# Allegro board CLAYR6.brd
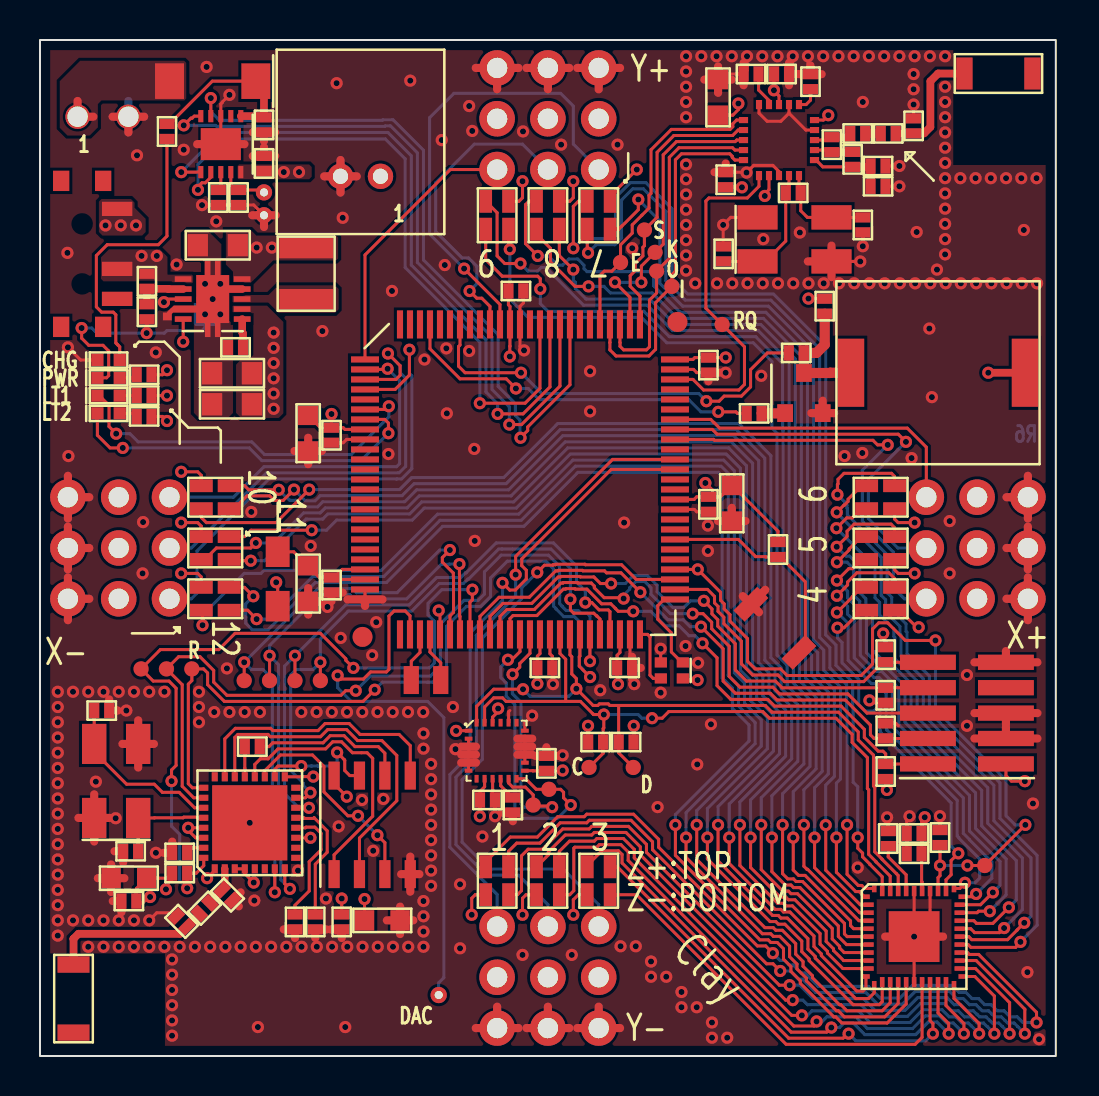
[diagram p0: board, top side]
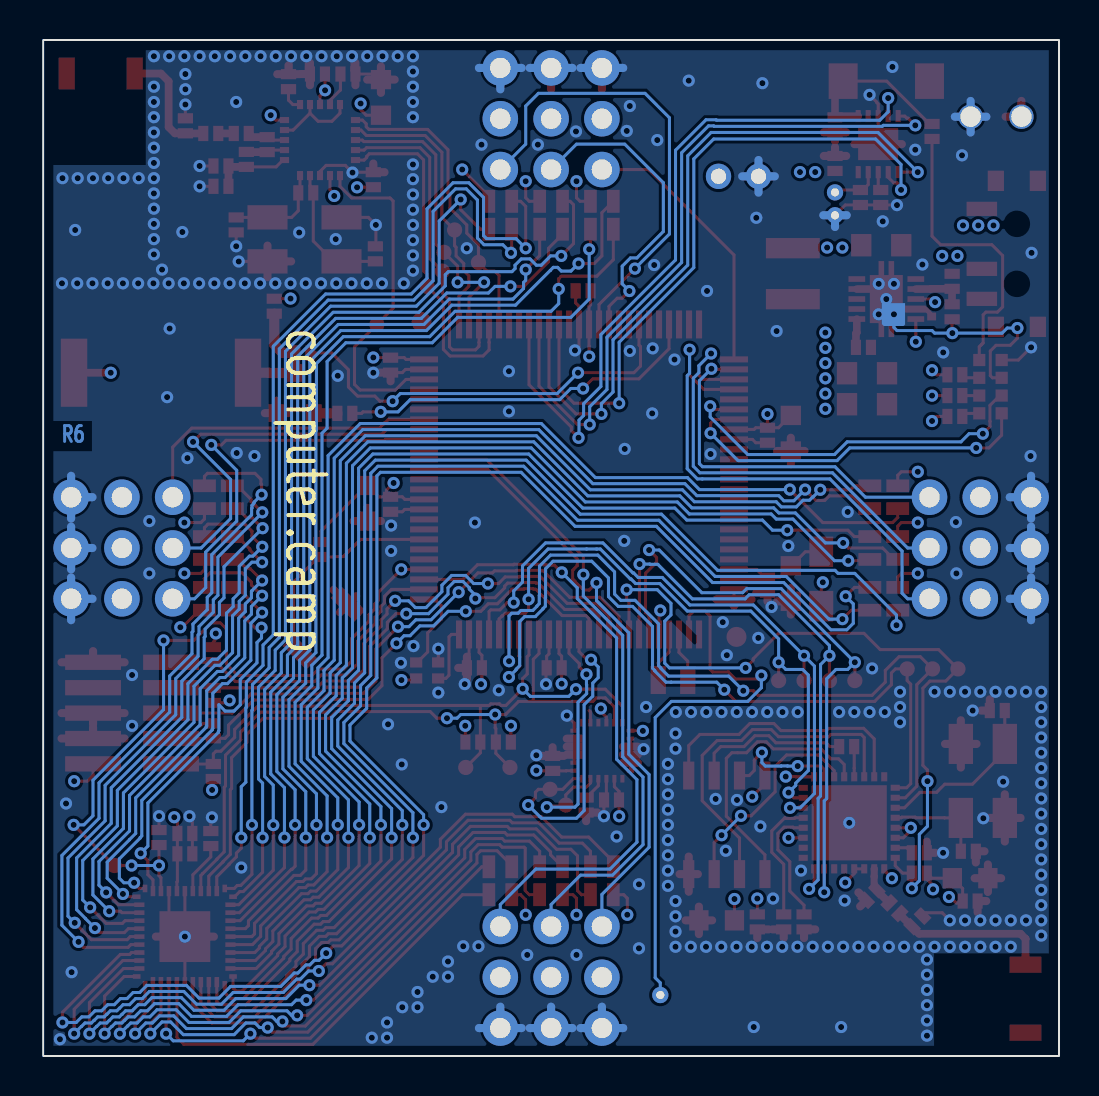
[diagram p1: board, bottom side, seen from below]

Outline 50.8 x 50.8 mm; copper layers: TOP, GND, PWR, BOTTOM. Coordinates in mm from the lower left corner of the outline.

## Placement (name value [footprint] x y rotation side)
AE1  2450AT18A100E  [ANT_1206]  47.93 49.12 0 top
AE2  2450AT18A100E  [ANT_1206]  1.68 2.87 270 top
C1  1uF  [C0402]  11.2 44.63 90 top
C3  1uF  [C0402]  11.2 46.56 270 top
C4  .1uf  [C0402]  25.32 14.63 90 top
C5  .1uf  [C0402]  22.38 12.8 0 top
C6  .1uf  [C0402]  23.65 12.55 270 top
C7  .1uf  [C0402]  34.29 43.81 90 top
C8  .1uf  [C0402]  37.08 49.1 0 top
C9  10uF  [C0603]  33.91 47.93 90 top
C10  1.5pF  [C0402]  42.42 46.13 0 top
C11  1.0pF  [C0402]  43.69 46.51 90 top
C12  2200pF  [C0402]  41.91 44.5 0 top
C13  4.7pF  [C0402]  41.91 43.48 0 top
C14  22pF  [C0402]  34.19 40.11 90 top
C15  22pF  [C0402]  41.15 41.55 270 top
C16  .033uF  [C0402]  35.56 49.1 180 top
C17  1uF  [C0402]  43.71 10.11 180 top
C18  .1uf  [C0402]  43.71 11.13 180 top
C19  .1uf  [C0402]  14.58 23.55 270 top
C20  10uF  [C0603]  13.41 23.62 270 top
C21  .1uf  [C0402]  14.58 31.04 270 top
C22  .1uf  [C0402]  29.24 19.41 0 top
C23  .1uf  [C0402]  23.8 38.25 0 top
C24  .1uf  [C0402]  25.25 19.41 0 top
C25  .1uf  [C0402]  33.43 34.54 270 top
C26  .1uf  [C0402]  33.43 27.58 270 top
C27  10uF  [C0603]  34.59 27.64 270 top
C28  10uF  [C0603]  13.41 31.14 270 top
C29  10uF  [C0805]  9.6 32.59 180 top
C30  10uF  [C0805]  8.89 40.54 180 top
C31  10uF  [C0805]  9.6 34.14 180 top
C32  .1uf  [C0402]  9.78 35.43 180 top
C33  10uF  [C0603]  4.45 8.89 180 top
C34  10uF  [C0603]  17.12 6.78 0 top
C35  .1uf  [C0402]  4.45 7.75 180 top
C36  .1uf  [C0402]  15.09 6.71 270 top
C37  5.6pF  [C0402]  8.23 7.39 225 top
C38  15pF  [C0402]  4.53 10.24 180 top
C39  15pF  [C0402]  3.09 17.27 0 top
D1  SE20AFJ-M3/6A  [DO_221AC]  8.64 48.74 180 top
DS1  LB_QH9G_N100_35_1  [LED_0402]  3.43 34.8 0 top
DS2  LB_QH9G_N100_35_1  [LED_0402]  3.43 33.02 0 top
DS3  LB_QH9G_N100_35_1  [LED_0402]  3.43 32.13 0 top
DS4  -  [LTST_C19FD1WT]  27.94 42.04 90 top
DS5  -  [LTST_C19FD1WT]  25.4 42.04 90 top
DS6  -  [LTST_C19FD1WT]  22.86 42.04 90 top
DS7  -  [LTST_C19FD1WT]  8.76 27.94 180 top
DS8  -  [LTST_C19FD1WT]  8.76 25.4 180 top
DS9  -  [LTST_C19FD1WT]  8.76 22.86 180 top
DS10  -  [LTST_C19FD1WT]  27.94 8.76 270 top
DS11  -  [LTST_C19FD1WT]  25.4 8.76 270 top
DS12  -  [LTST_C19FD1WT]  22.86 8.76 270 top
DS13  -  [LTST_C19FD1WT]  42.04 22.86 0 top
DS14  -  [LTST_C19FD1WT]  42.04 25.4 0 top
DS15  -  [LTST_C19FD1WT]  42.04 27.94 0 top
DS16  LB_QH9G_N100_35_1  [LED_0402]  3.43 33.91 0 top
J1  640456-2  [2X1_HEADER_100]  1.88 46.96 0 top
J2  S2B-PH-K-S(LF)(SN)  [JST2_SIDE_PTH]  16.03 46.58 0 top
J3  GPIO_3x3_100  [GPIO_3X3_100]  25.4 3.94 0 top
J4  GPIO_3x3_100  [GPIO_3X3_100]  25.4 46.86 180 top
J5  GPIO_3x3_100  [GPIO_3X3_100]  3.94 25.4 270 top
J6  GPIO_3x3_100  [GPIO_3X3_100]  46.86 25.4 90 top
J7  2x5 SMT  [FTSH_10]  46.35 17.14 90 top
L1  3.9nH  [L0402]  40.89 46.13 0 top
L2  8.2nH  [L0402]  39.6 45.57 90 top
L3  2.7nH  [L0402]  40.64 44.83 270 top
L4  600 Ohm  [FERRITE0805]  11.89 23.85 270 top
L5  2.2uH  [L1210]  13.31 39.12 270 top
L6  3.9nH  [L0402]  9.37 8.05 135 top
L7  3.9nH  [L0402]  7.09 6.73 315 top
LS1  PKMCS0909E4000-R1  [PKMCS]  44.91 34.16 0 top
NOREF  -  []  0 0 90 top
NOREF#2  -  []  25.4 25.4 0 top
NOREF#3  -  []  0 50.8 0 top
Q1  3904  [SOT23_3]  38.2 33.15 180 top
R1  30  [R0402]  6.35 46.23 90 top
R2  30  [R0402]  5.21 33.02 0 top
R3  30  [R0402]  5.21 31.98 0 top
R4  10k  [R0402]  36.91 25.32 90 top
R5  10k  [R0402]  9.93 42.93 90 top
R6  3.0k  [R0402]  8.92 42.93 90 top
R7  1.0K  [R0402]  39.24 37.49 90 top
R8  1.0K  [R0402]  37.82 35.15 0 top
R9  1.0K  [R0402]  35.71 32.13 0 top
R10  10k  [R0402]  29.31 15.7 0 top
R11  10k  [R0402]  27.79 15.7 180 top
R12  1M  [R0402]  37.67 43.15 0 top
R13  22k  [R0402]  38.53 48.72 270 top
R14  100k  [R0402]  45.01 10.92 270 top
R15  7.68k  [R0402]  42.42 10.87 270 top
R16  10k  [R0402]  42.29 20.07 270 top
R17  10k  [R0402]  42.29 18.03 90 top
R18  10k  [R0402]  42.29 16.26 270 top
R19  10k  [R0402]  42.29 14.22 90 top
R20  2.55M  [R0402]  5.35 38.73 90 top
R21  30  [R0402]  5.21 34.06 0 top
R22  220k  [R0402]  5.35 37.21 90 top
R23  10k  [R0402]  12.75 6.71 90 top
R24  10k  [R0402]  13.77 6.71 90 top
R25  10k  [R0402]  6.98 9.14 180 top
R26  200  [R0402]  10.62 15.47 0 top
R27  12k  [R0402]  6.98 10.16 0 top
SW1  CUS-12TB  [CUS_12TB]  2.11 40.11 270 top
SW2  B3U-1000P  [TAC_SWITCH_B3U_1000P]  36.75 21.39 315 top
TP1  TP  [TP_030]  29.67 14.43 0 top
TP2  TP  [TP_030]  27.46 14.43 0 top
TP3  TP  [TP_030]  24.66 12.55 0 top
TP4  TP  [TP_030]  25.45 13.33 0 top
TP5  TP  [TP_030]  29.03 39.67 90 top
TP6  TP  [TP_030]  30.23 41.3 90 top
TP7  TP  [TP_030]  30.76 40.18 90 top
TP8  TP  [TP_030]  30.84 39.24 90 top
TP9  TP  [TP_030]  31.6 38.48 90 top
TP10  TP  [TP_030]  34.11 36.58 90 top
TP11  TP  [TP_030]  47.24 9.52 0 top
TP12  TP  [TP_030]  7.59 19.35 0 top
TP13  TP  [TP_030]  6.32 19.35 0 top
TP14  TP  [TP_030]  5.05 19.35 0 top
TP15  TP  [TP_030]  14.02 18.77 0 top
TP16  TP  [TP_030]  12.75 18.77 0 top
TP17  TP  [TP_030]  11.48 18.77 0 top
TP18  TP  [TP_030]  10.21 18.77 0 top
U1  LM3658  [WSON10_3X3]  9.04 45.59 180 top
U2  MPU9250  [QFN24_3X3]  22.83 15.27 0 top
U3  NRF24L01P  [QFN20_4X4]  36.96 45.8 0 top
U4  IS31FL3236  [QFN44_5X5]  43.71 5.97 0 top
U5  MK64FN1M0VLL12  [QFP100_14X14]  24 28.83 0 top
U6  TPS61201DRCT  [VSON10_3X3]  8.64 37.85 90 top
U7  ESP8266EX  [QFN32_5X5]  10.49 11.66 90 top
U8  W25Q80DVSNIG  [CL_SOIC8]  16.61 11.56 0 top
W1  26AWG  [WIRE_26AWG]  19.94 3.05 0 top
W2  26AWG  [WIRE_26AWG]  11.2 43.18 0 top
W3  26AWG  [WIRE_26AWG]  11.2 42.04 0 top
Y1  16MHz  [TXC_XTAL_5X3]  37.73 40.83 0 top
Y2  8MHz  [ASCO]  31.6 19.28 180 top
Y3  34.728kHz  [ABS06]  19.3 18.8 0 top
Y4  26MHz  [TXC_XTAL_5X3]  3.81 13.75 90 top

## Library data of the parts
AE1 AE2 = ANTENNA
C1 C3-C39 = CAP_NP
D1 = DIODE
DS1-DS3 DS16 = LED
DS4-DS15 = LTST_C19FD1WT
J1 J2 = CON_2PIN
J3-J6 = GPIO_3X3_100
J7 = CON_10PIN
L1-L3 L5-L7 = INDUCTOR
L4 = FERRITE
LS1 = BUZZER
Q1 = NPN
R1-R27 = RESISTOR
SW1 = SWITCH_SPDT
SW2 = SPST_NO
TP1-TP18 = TESTPOINT
U1 = LM3658
U2 = MPU9250
U3 = NRF24L01
U4 = IS31FL3236
U5 = MK64FN1M0VLL12
U6 = TPS61201
U7 = ESP8266EX
U8 = W25Q
W1-W3 = WIRE
Y1 Y4 = CRYSTAL_4
Y2 = ASCO_OSC
Y3 = CRYSTAL

## Footprints (pads in the part's own frame, mm; a bottom-side part is the same pattern mirrored in y, then rotated)
2X1_HEADER_100
  round 1.219 hole 1.016: 1(0,0) 2(2.54,0)
ABS06
  rect 0.762x1.397 smd: 1(-0.737,0) 2(0.737,0)
ANT_1206
  rect 0.813x1.6 smd: 1(-1.7,0) 2(1.7,0)
ASCO
  rect 0.61x0.508 smd: 1(-0.55,-0.4) 2(0.55,-0.4) 3(0.55,0.4) 4(-0.55,0.4)
C0402
  rect 0.508x0.762 smd: 1(-0.375,0) 2(0.375,0)
C0603
  rect 0.965x1.016 smd: 1(-0.889,0) 2(0.889,0)
C0805
  rect 1.016x1.118 smd: 1(-1,0) 2(1,0)
CL_SOIC8
  rect 0.559x1.397 smd: 1(-1.905,-2.464) 2(-0.635,-2.464) 3(0.635,-2.464) 4(1.905,-2.464) 5(1.905,2.464) 6(0.635,2.464) 7(-0.635,2.464) 8(-1.905,2.464)
CUS_12TB
  rect 1.016x0.813 smd: (-3.65,1.05) (-3.65,-1.05) (3.65,1.05) (3.65,-1.05)
  round 0 smd: (-1.5,0) (1.5,0)
  rect 0.711x1.524 smd: 1(-2.25,1.75) 2(0.75,1.75) 3(2.25,1.75)
DO_221AC
  rect 1.448x1.778 smd: 1(-2.159,0) 2(2.159,0)
FERRITE0805
  rect 1.524x1.194 smd: 1(-1.359,0) 2(1.359,0)
FTSH_10
  rect 0.762x2.794 smd: 1(-2.54,-1.95) 2(-2.54,1.95) 3(-1.27,-1.95) 4(-1.27,1.95) 5(0,-1.95) 6(0,1.95) 7(1.27,-1.95) 8(1.27,1.95) 9(2.54,-1.95) 10(2.54,1.95)
GPIO_3X3_100
  round 1.778 hole 1.016: 1(-2.54,2.54) 2(0,2.54) 3(2.54,2.54) 4(-2.54,0) 5(0,0) 6(2.54,0) 7(-2.54,-2.54) 8(0,-2.54) 9(2.54,-2.54)
JST2_SIDE_PTH
  round 1.27 hole 0.762: 1(1,-2.6) 2(-1,-2.6)
L0402
  rect 0.508x0.762 smd: 1(-0.375,0) 2(0.375,0)
L1210
  rect 1.016x2.692 smd: 1(-1.275,0) 2(1.275,0)
LED_0402
  rect 0.61x0.61 smd: 1(-0.559,0) 2(0.559,0)
LTST_C19FD1WT
  rect 1.143x0.635 smd: 1(0.699,0.572) 2(-0.699,0.572) 3(-0.699,-0.572) 4(0.699,-0.572)
PKMCS
  rect 1.321x3.404 smd: 1(-4.35,0) 2(4.35,0)
QFN20_4X4
  rect 0.457x0.305 smd: 1(-1.775,1.001) 2(-1.775,0.501) 3(-1.775,0.001) 4(-1.775,-0.499) 5(-1.775,-0.999) 11(1.775,-0.999) 12(1.775,-0.499) 13(1.775,0.001) 14(1.775,0.501) 15(1.775,1.001)
  rect 0.305x0.457 smd: 6(-1.001,-1.775) 7(-0.501,-1.775) 8(-0.001,-1.775) 9(0.499,-1.775) 10(0.999,-1.775) 16(0.999,1.775) 17(0.499,1.775) 18(-0.001,1.775) 19(-0.501,1.775) 20(-1.001,1.775)
QFN24_3X3
  rect 0.381x0.203 smd: 1(-1.402,1) 2(-1.402,0.6) 3(-1.402,0.2) 4(-1.402,-0.2) 5(-1.402,-0.6) 6(-1.402,-1) 13(1.412,-1) 14(1.412,-0.6) 15(1.412,-0.2) 16(1.412,0.2) 17(1.412,0.6) 18(1.412,1)
  rect 0.203x0.381 smd: 7(-1,-1.402) 8(-0.6,-1.402) 9(-0.2,-1.402) 10(0.2,-1.402) 11(0.6,-1.402) 12(1,-1.402) 19(1,1.402) 20(0.6,1.402) 21(0.2,1.402) 22(-0.2,1.402) 23(-0.6,1.402) 24(-1,1.402)
QFN32_5X5
  rect 0.457x0.305 smd: 1(-2.301,1.75) 2(-2.301,1.25) 3(-2.301,0.749) 4(-2.301,0.249) 5(-2.301,-0.251) 6(-2.301,-0.752) 7(-2.301,-1.252) 8(-2.301,-1.753) 17(2.301,-1.753) 18(2.301,-1.252) 19(2.301,-0.752) 20(2.301,-0.251) 21(2.301,0.249) 22(2.301,0.749) 23(2.301,1.25) 24(2.301,1.75)
  rect 0.305x0.457 smd: 9(-1.75,-2.301) 10(-1.25,-2.301) 11(-0.749,-2.301) 12(-0.249,-2.301) 13(0.251,-2.301) 14(0.752,-2.301) 15(1.252,-2.301) 16(1.753,-2.301) 25(1.753,2.301) 26(1.252,2.301) 27(0.752,2.301) 28(0.251,2.301) 29(-0.249,2.301) 30(-0.749,2.301) 31(-1.25,2.301) 32(-1.75,2.301)
  rect 3.759x3.759 smd: 33(0,0)
QFN44_5X5
  rect 0.381x0.229 smd: 1(-2.409,1.994) 11(-2.409,-1.994) 23(2.409,-1.994) 33(2.409,1.994)
  rect 0.508x0.229 smd: 2(-2.276,1.595) 3(-2.276,1.196) 4(-2.276,0.798) 5(-2.276,0.399) 6(-2.276,0) 7(-2.276,-0.399) 8(-2.276,-0.798) 9(-2.276,-1.196) 10(-2.276,-1.595) 24(2.276,-1.595) 25(2.276,-1.196) 26(2.276,-0.798) 27(2.276,-0.399) 28(2.276,0) 29(2.276,0.399) 30(2.276,0.798) 31(2.276,1.196) 32(2.276,1.595)
  rect 0.229x0.381 smd: 12(-1.994,-2.409) 22(1.994,-2.409) 34(1.994,2.409) 44(-1.994,2.409)
  rect 0.229x0.508 smd: 13(-1.595,-2.276) 14(-1.196,-2.276) 15(-0.798,-2.276) 16(-0.399,-2.276) 17(0,-2.276) 18(0.399,-2.276) 19(0.798,-2.276) 20(1.196,-2.276) 21(1.595,-2.276) 35(1.595,2.276) 36(1.196,2.276) 37(0.798,2.276) 38(0.399,2.276) 39(0,2.276) 40(-0.399,2.276) 41(-0.798,2.276) 42(-1.196,2.276) 43(-1.595,2.276)
  rect 2.54x2.54 smd: 45(0,0)
QFP100_14X14
  round 1 smd: (-7.874,-7.874) (7.874,7.874)
  rect 1.397x0.305 smd: 1(-7.75,6) 2(-7.75,5.5) 3(-7.75,5) 4(-7.75,4.5) 5(-7.75,4) 6(-7.75,3.5) 7(-7.75,3) 8(-7.75,2.5) 9(-7.75,2) 10(-7.75,1.5) 11(-7.75,1) 12(-7.75,0.5) 13(-7.75,0) 14(-7.75,-0.5) 15(-7.75,-1) 16(-7.75,-1.5) 17(-7.75,-2) 18(-7.75,-2.5) 19(-7.75,-3) 20(-7.75,-3.5) 21(-7.75,-4) 22(-7.75,-4.5) 23(-7.75,-5) 24(-7.75,-5.5) 25(-7.75,-6) 51(7.75,-6) 52(7.75,-5.5) 53(7.75,-5) 54(7.75,-4.5) 55(7.75,-4) 56(7.75,-3.5) 57(7.75,-3) 58(7.75,-2.5) 59(7.75,-2) 60(7.75,-1.5) 61(7.75,-1) 62(7.75,-0.5) 63(7.75,0) 64(7.75,0.5) 65(7.75,1) 66(7.75,1.5) 67(7.75,2) 68(7.75,2.5) 69(7.75,3) 70(7.75,3.5) 71(7.75,4) 72(7.75,4.5) 73(7.75,5) 74(7.75,5.5) 75(7.75,6)
  rect 0.305x1.397 smd: 26(-6,-7.75) 27(-5.5,-7.75) 28(-5,-7.75) 29(-4.5,-7.75) 30(-4,-7.75) 31(-3.5,-7.75) 32(-3,-7.75) 33(-2.5,-7.75) 34(-2,-7.75) 35(-1.5,-7.75) 36(-1,-7.75) 37(-0.5,-7.75) 38(0,-7.75) 39(0.5,-7.75) 40(1,-7.75) 41(1.5,-7.75) 42(2,-7.75) 43(2.5,-7.75) 44(3,-7.75) 45(3.5,-7.75) 46(4,-7.75) 47(4.5,-7.75) 48(5,-7.75) 49(5.5,-7.75) 50(6,-7.75) 76(6,7.75) 77(5.5,7.75) 78(5,7.75) 79(4.5,7.75) 80(4,7.75) 81(3.5,7.75) 82(3,7.75) 83(2.5,7.75) 84(2,7.75) 85(1.5,7.75) 86(1,7.75) 87(0.5,7.75) 88(0,7.75) 89(-0.5,7.75) 90(-1,7.75) 91(-1.5,7.75) 92(-2,7.75) 93(-2.5,7.75) 94(-3,7.75) 95(-3.5,7.75) 96(-4,7.75) 97(-4.5,7.75) 98(-5,7.75) 99(-5.5,7.75) 100(-6,7.75)
R0402
  rect 0.508x0.762 smd: 1(-0.375,0) 2(0.375,0)
SOT23_3
  rect 0.787x0.889 smd: 1(0.94,1.003) 2(-0.94,1.003) 3(0,-1.003)
TAC_SWITCH_B3U_1000P
  rect 0.787x1.676 smd: 1(-1.7,0) 2(1.7,0)
TP_030
  round 0.762 smd: 1(0,0)
TXC_XTAL_5X3
  rect 2.007x1.219 smd: 1(-1.85,-1.1) 2(1.85,-1.1) 3(1.85,1.1) 4(-1.85,1.1)
VSON10_3X3
  rect 0.279x0.838 smd: 1(-1,-1.475) 2(-0.5,-1.475) 3(0,-1.475) 4(0.5,-1.475) 5(1,-1.475) 6(1,1.475) 7(0.5,1.475) 8(0,1.475) 9(-0.5,1.475) 10(-1,1.475)
  custom 3.8x1.65 smd: 11(0,0)
WIRE_26AWG
  round 0.813 hole 0.406: 1(0,0)
WSON10_3X3
  rect 0.254x0.61 smd: 1(-1,-1.4) 2(-0.5,-1.4) 3(0,-1.4) 4(0.5,-1.4) 5(0.999,-1.4) 6(0.999,1.4) 7(0.5,1.4) 8(0,1.4) 9(-0.5,1.4) 10(-1,1.4)
  rect 2.007x1.6 smd: 11(0,0)

## Nets
GND: C1.2 C3.2 C4.2 C5.2 C6.2 C7.2 C8.2 C9.2 C11.2 C12.2 C13.2 C14.2 C15.2 C16.2 C17.2 C18.2 C19.2 C20.2 C21.2 C22.2 C23.2 C24.2 C25.2 C26.2 C27.2 C28.2 C33.2 C34.2 C35.2 C36.2 C38.2 C39.2 DS1.1(C) J1.2 J2.2 J3.7(GND2) J3.8(GND1) J3.9(GND) J4.7(GND2) J4.8(GND1) J4.9(GND) J5.7(GND2) J5.8(GND1) J5.9(GND) J6.7(GND2) J6.8(GND1) J6.9(GND) J7.3 J7.5 J7.9 L6.1 L7.1 Q1.2(E) R5.1 R6.1 R13.1 R14.1 R15.1 R18.1 R23.1 R24.1 R27.1 SW2.1 U1.3(GND#3) U1.11(GND#11) U2.2(NC5) U2.3(NC4) U2.4(NC3) U2.5(NC2) U2.6(NC) U2.9(AD0/SDO) U2.14(NC6) U2.15(NC7) U2.16(NC8) U2.17(NC9) U2.18(GND) U2.20(RESV_GND) U3.8(VSS#8) U3.14(VSS#14) U3.17(VSS#17) U3.20(VSS#20) U4.17(GND#17) U4.37(AD) U4.39(GND#39) U4.45(GND#45) U5.9(VSS#9) U5.24(VREFL) U5.25(VSSA) U5.41(VSS#41) U5.49(VSS#49) U5.60(VSS#60) U5.74(VSS#74) U5.88(VSS#88) U6.9(GND) U7.33(GND) U8.4(GND) W3.1 Y1.2(GND) Y1.4(GND4) Y2.2(GND) Y4.2(GND) Y4.4(GND4)
PGND: C29.2 C30.2 C31.2 C32.2 DS16.1(C) R22.1 U6.4(PGND) U6.11(PGND2)
VBAT: C30.1 L5.1 R20.2 SW1.2 U6.5(VIN) U6.6(EN) U6.8(PS)
VCC: C4.1 C5.1 C7.1 C8.1 C9.1 C17.1 C18.1 C21.1 C22.1 C23.1 C24.1 C25.1 C26.1 C27.1 C28.1 C29.1 C31.1 C33.1 C34.1 C35.1 C36.1 DS4.4(VDD) DS5.4(VDD) DS6.4(VDD) DS7.4(VDD) DS8.4(VDD) DS9.4(VDD) DS10.4(VDD) DS11.4(VDD) DS12.4(VDD) DS13.4(VDD) DS14.4(VDD) DS15.4(VDD) J3.4(VDD) J3.5(VDD1) J3.6(VDD2) J4.4(VDD) J4.5(VDD1) J4.6(VDD2) J5.4(VDD) J5.5(VDD1) J5.6(VDD2) J6.4(VDD) J6.5(VDD1) J6.6(VDD2) J7.1 L4.2 LS1.2 R2.2 R3.2 R4.2 R7.2 R10.2 R11.2 R16.1 R17.1 R19.1 R21.2 R25.2 U2.1(RESV_VCC) U2.8(VDDIO#8) U2.13(VDDIO#13) U2.22(NCS) U3.7(VDD#7) U3.15(VDD#15) U3.18(VDD#18) U4.38(VCC) U5.8(VDD#8) U5.30(VBAT) U5.40(VDD#40) U5.48(VDD#48) U5.61(VDD#61) U5.75(VDD#75) U5.89(VDD#89) U6.2(VOUT) U6.10(FB) U7.1(VDDA#1) U7.3(VDD3P3#3) U7.4(VDD3P3#4) U7.11(VDDPST#11) U7.17(VDDPST#17) U7.29(VDDD) U7.30(VDDA#30) U8.8(VCC) Y2.4(VDD)
VDD_RTC: U7.5(VDD_RTC)
#CS: U7.20(SD_CMD) U8.1(C\S\)
#HOLD: U7.18(SD_DATA_2) U8.7(H\O\L\D\)
#RST: J7.10 R16.2 U5.52(RESET_B)
#WP: U7.19(SD_DATA_3) U8.3(W\P\)
ADC0_DM0/ADC1_DM3: U5.19(ADC0_DM0/ADC1_DM3)
ADC0_DM1: U5.15(ADC0_DM1)
ADC0_DP0/ADC1_DP3: U5.18(ADC0_DP0/ADC1_DP3)
ADC0_DP1: U5.14(ADC0_DP1)
ADC1_DM0/ADC0_DM3: U5.21(ADC1_DM0/ADC0_DM3)
ADC1_DM1: U5.17(ADC1_DM1)
ADC1_DP0/ADC0_DP3: U5.20(ADC1_DP0/ADC0_DP3)
ADC1_DP1: U5.16(ADC1_DP1)
CHG_OUT: C1.1 J2.1 SW1.1 U1.10(BATT)
CLK: R26.2 U8.6(CLK)
DI: U7.23(SD_DATA_1) U8.5(DI)
DO: U7.22(SD_DATA_0) U8.2(DO)
EN_B: U1.4(USB_SEL) U5.83(PTC11/LLWU_P11/ADC1_SE7B/I2C1_S)
FSYNC: TP3.1 U2.11(FSYNC) U5.39(PTA5/USB_CLKIN/FTM0_CH2/MII0_RX)
IMU_INT: TP4.1 U2.12(INT) U5.38(PTA4/LLWU_P3/NMI_B/EZP_CS_B/FTM)
LED1: DS2.1(C) U5.6(PTE5/SPI1_PCS2/UART3_RX/SDHC0_D)
LED2: DS3.1(C) U5.7(PTE6/SPI1_PCS3/UART3_CTS_B/I2S0)
MESH_#CS: TP6.1 U3.2(CSN) U5.76(PTC4/LLWU_P8/SPI0_PCS0/UART1_TX)
MESH_CE: TP5.1 U3.1(CE) U5.80(PTC8/ADC1_SE4B/CMP0_IN2/FTM3_CH)
MESH_IRQ: TP10.1 U3.6(IRQ) U5.73(PTC3/LLWU_P7/CMP1_IN1/SPI0_PCS1)
MISO0: TP9.1 U3.5(MISO) U5.79(PTC7/CMP0_IN1/SPI0_SIN/USB_SOF_)
MOSI0: TP8.1 U3.4(MOSI) U5.78(PTC6/LLWU_P10/CMP0_IN0/SPI0_SOU)
PTA0/JTAG_TCLK/SWD_CLK/EZP_CLK/: J7.4 R18.2 U5.34(PTA0/JTAG_TCLK/SWD_CLK/EZP_CLK/)
PTA1/JTAG_TDI/EZP_DI/UART0_RX/F: J7.8 R17.2 U5.35(PTA1/JTAG_TDI/EZP_DI/UART0_RX/F)
PTA2/JTAG_TDO/TRACE_SWO/EZP_D0/: J7.6 U5.36(PTA2/JTAG_TDO/TRACE_SWO/EZP_D0/)
PTA3/JTAG_TMS/SWD_DIO/UART0_RTS: J7.2 R19.2 U5.37(PTA3/JTAG_TMS/SWD_DIO/UART0_RTS)
PTA18/EXTAL0/FTM0_FLT2/FTM_CLKI: U5.50(PTA18/EXTAL0/FTM0_FLT2/FTM_CLKI) Y2.3(OUT)
PTA19/XTAL0/FTM1_FLT0/FTM_CLKIN: U5.51(PTA19/XTAL0/FTM1_FLT0/FTM_CLKIN) Y2.1(EN)
PTB2/ADC0_SE12/I2C0_SCL/UART0_R: U5.55(PTB2/ADC0_SE12/I2C0_SCL/UART0_R)
PTB3/ADC0_SE13/I2C0_SDA/UART0_C: U5.56(PTB3/ADC0_SE13/I2C0_SDA/UART0_C)
PTB10/ADC1_SE14/SPI1_PCS0/UART3: U5.58(PTB10/ADC1_SE14/SPI1_PCS0/UART3)
PTB11/ADC1_SE15/SPI1_SCK/UART3_: U5.59(PTB11/ADC1_SE15/SPI1_SCK/UART3_)
PTB16/SPI1_SOUT/UART0_RX/FTM_CL: U5.62(PTB16/SPI1_SOUT/UART0_RX/FTM_CL)
PTB17/SPI1_SIN/UART0_TX/FTM_CLK: U5.63(PTB17/SPI1_SIN/UART0_TX/FTM_CLK)
PTB20/SPI2_PCS0/FB_AD31/CMP0_OU: U5.66(PTB20/SPI2_PCS0/FB_AD31/CMP0_OU)
PTC0/ADC0_SE14/SPI0_PCS4/PDB0_E: U5.70(PTC0/ADC0_SE14/SPI0_PCS4/PDB0_E)
PTC1/LLWU_P6/ADC0_SE15/SPI0_PCS: U5.71(PTC1/LLWU_P6/ADC0_SE15/SPI0_PCS)
PTC2/ADC0_SE4B/CMP1_IN0/SPI0_PC: U5.72(PTC2/ADC0_SE4B/CMP1_IN0/SPI0_PC)
PTC9/ADC1_SE5B/CMP0_IN3/FTM3_CH: U5.81(PTC9/ADC1_SE5B/CMP0_IN3/FTM3_CH)
PTC10/ADC1_SE6B/I2C1_SCL/FTM3_C: U5.82(PTC10/ADC1_SE6B/I2C1_SCL/FTM3_C)
PTC15/UART4_TX/FB_AD24: U5.87(PTC15/UART4_TX/FB_AD24)
PTC18/UART3_RTS_B/ENET0_1588_TM: U5.92(PTC18/UART3_RTS_B/ENET0_1588_TM)
PTD0/LLWU_P12/SPI0_PCS0/UART2_R: U5.93(PTD0/LLWU_P12/SPI0_PCS0/UART2_R)
PTD2/LLWU_P13/SPI0_SOUT/UART2_R: U5.95(PTD2/LLWU_P13/SPI0_SOUT/UART2_R)
PTD3/SPI0_SIN/UART2_TX/FTM3_CH3: U5.96(PTD3/SPI0_SIN/UART2_TX/FTM3_CH3)
PTD5/ADC0_SE6B/SPI0_PCS2/UART0_: U5.98(PTD5/ADC0_SE6B/SPI0_PCS2/UART0_)
PTD6/LLWU_P16/ADC0_SE7B/SPI0_PC: U5.99(PTD6/LLWU_P16/ADC0_SE7B/SPI0_PC)
PTD7/CMT_IRQ/UART0_TX/FTM0_CH7/: U5.100(PTD7/CMT_IRQ/UART0_TX/FTM0_CH7/)
PTE4/LLWU_P2/SPI1_PCS0/UART3_TX: U5.5(PTE4/LLWU_P2/SPI1_PCS0/UART3_TX)
SCK0: TP7.1 U3.3(SCK) U5.77(PTC5/LLWU_P9/SPI0_SCK/LPTMR0_AL)
SCL2: R11.1 TP2.1 U2.23(SCL/SCLK) U4.42(SCL) U5.42(PTA12/CMP2_IN0/CAN0_TX/FTM1_CH0)
SDA2: R10.1 TP1.1 U2.24(SDA/SDI) U4.41(SDA) U5.43(PTA13/LLWU_P4/CMP2_IN1/CAN0_RX/)
SDB: R14.2 TP11.1 U4.36(SDB) U5.54(PTB1/ADC0_SE9/ADC1_SE9/I2C0_SDA)
STAT1: U1.7(STAT1) U5.86(PTC14/UART4_RX/FB_AD25)
STAT2: U1.6(STAT2) U5.85(PTC13/UART4_CTS_B/FB_AD26)
USB0_DM: U5.11(USB0_DM)
USB0_DP: U5.10(USB0_DP)
USB_SEL: U1.5(EN_B) U5.84(PTC12/UART4_RTS_B/FB_AD27/FTM3_)
USBPWR: U1.2(USBPWR)
VOUT33: U5.12(VOUT33)
VREF_OUT/CMP1_IN5/CMP0_IN5/ADC1: U5.26(VREF_OUT/CMP1_IN5/CMP0_IN5/ADC1)
VREGIN: U5.13(VREGIN)
WIFI_#RESET: R25.1 TP14.1 U5.33(PTE26/ENET_1588_CLKIN/UART4_CTS) U7.32(EXT_RSTB)
WIFI_CHIP_EN: TP18.1 U5.31(PTE24/ADC0_SE17/UART4_TX/I2C0__) U7.7(CHIP_EN)
WIFI_GPIO0: TP15.1 U5.46(PTA16/SPI0_SOUT/UART0_CTS_B/UAR) U7.15(GPIO0)
WIFI_GPIO2: TP16.1 U5.47(PTA17/ADC1_SE17/SPI0_SIN/UART0_) U7.14(GPIO2)
WIFI_RX: TP12.1 U5.44(PTA14/SPI0_PCS0/UART0_TX/MII0_R) U7.25(U0RXD)
WIFI_TX: TP13.1 U5.45(PTA15/SPI0_SCK/UART0_RX/MII0_TX) U7.26(U0TXD)
WIFI_XPD_DCDC: TP17.1 U5.32(PTE24/ADC0_SE18/UART4_RX/I2C0_S) U7.8(XPD_DCDC)
N00198: LS1.1 Q1.3(C) R7.1 R8.2
N00230: R13.2 U3.16(IREF)
N00299: R5.2 U1.9(TS) W2.1
N00337: R6.2 U1.8(ISET)
N00355: L5.2 U6.3(L)
N00409: C15.1 R12.2 U3.10(XC1) Y1.3
N00478: C32.1 U6.1(VAUX)
N00507: C14.1 R12.1 U3.9(XC2) Y1.1
N00519: Q1.1(B) R9.2
N00975: R15.2 U4.40(R_EXT)
N01037: R20.1 R22.2 U6.7(UVLO)
N01220: DS16.2(A) R21.1
N01340: C16.1 U3.19(DVDD)
N01687: DS5.1(BLUE) U4.2(OUT4)
N01689: DS5.2(RED) U4.3(OUT5)
N01691: DS5.3(GREEN) U4.4(OUT6)
N01749: DS6.1(BLUE) U4.5(OUT7)
N01755: DS6.2(RED) U4.6(OUT8)
N01761: DS6.3(GREEN) U4.7(OUT9)
N02099: R26.1 U7.21(SD_CLK)
N02614: C6.1 U2.10(REGOUT)
N02615: DS7.1(BLUE) U4.8(OUT10)
N02621: DS7.2(RED) U4.9(OUT11)
N02627: DS7.3(GREEN) U4.10(OUT12)
N02738: DS8.1(BLUE) U4.11(OUT13)
N02744: DS8.2(RED) U4.12(OUT14)
N02750: DS8.3(GREEN) U4.13(OUT15)
N02922: DS9.1(BLUE) U4.14(OUT16)
N02928: DS9.2(RED) U4.15(OUT17)
N02934: DS9.3(GREEN) U4.16(OUT18)
N03097: C12.1 C13.1 L3.2 U3.11(VDD_PA)
N03359: DS10.1(BLUE) U4.18(OUT19)
N03365: DS10.2(RED) U4.19(OUT20)
N03371: DS10.3(GREEN) U4.20(OUT21)
N03382: C38.1 U7.28(XTAL_IN) Y4.1
N03395: C39.1 U7.27(XTAL_OUT) Y4.3
N03481: DS11.1(BLUE) U4.21(OUT22)
N03487: DS11.2(RED) U4.22(OUT23)
N03493: DS11.3(GREEN) U4.23(OUT24)
N03631: DS12.1(BLUE) U4.24(OUT25)
N03637: DS12.2(RED) U4.25(OUT26)
N03643: DS12.3(GREEN) U4.26(OUT27)
N03677: L2.1 L3.1 U3.12(ANT1)
N03692: L1.1 L2.2 U3.13(ANT2)
N03711: C10.1 L1.2
N03715: AE1.1(IN) C10.2 C11.1
N03833: DS15.1(BLUE) U4.27(OUT28)
N03839: DS15.2(RED) U4.28(OUT29)
N03845: DS15.3(GREEN) U4.29(OUT30)
N03893: DS14.1(BLUE) U4.30(OUT31)
N03895: DS14.2(RED) U4.31(OUT32)
N03897: DS14.3(GREEN) U4.32(OUT33)
N03935: DS13.1(BLUE) U4.33(OUT34)
N03941: DS13.2(RED) U4.34(OUT35)
N03947: DS13.3(GREEN) U4.35(OUT36)
N04099: R24.2 U7.13(MTDO)
N04101: R23.2 U7.12(MTCK)
N05845: DS4.3(GREEN) U4.1(OUT3)
N05857: DS4.2(RED) U4.44(OUT2)
N05869: DS4.1(BLUE) U4.43(OUT1)
N05962: C37.1 L6.2 U7.2(LNA)
N05976: AE2.1(IN) C37.2 L7.2
N06603: U5.29(EXTAL32) Y3.2
N06615: U5.28(XTAL32) Y3.1
N08855: C3.1 D1.1(C) R1.2 U1.1(CHG_IN)
N08912: D1.2(A) J1.1
N0016014: R27.2 U7.31(RES12K)
N18669: C19.1 C20.1 L4.1 U5.22(VDDA) U5.23(VREFH)
N19391: R9.1 U5.97(PTD4/LLWU_P14/SPI0_PCS1/UART0_R)
N19403: R8.1 U5.94(PTD1/ADC0_SE5B/SPI0_SCK/UART2_C)
N22156: J3.2(GPIO2) U5.65(PTB19/CAN0_RX/FTM2_CH1/I2S0_TX_)
N22160: J3.3(GPIO3) U5.53(PTB0/LLWU_P5/ADC0_SE8/ADC1_SE8/)
N25749: J6.1(GPIO1) U5.67(PTB21/SPI2_SCK/FB_AD30/CMP1_OUT)
N25751: J6.2(GPIO2) U5.68(PTB22/SPI2_SOUT/FB_AD29/CMP2_OU)
N25753: J6.3(GPIO3) U5.69(PTB23/SPI2_SIN/SPI0_PCS5/FB_AD2)
N26831: J4.1(GPIO1) U5.90(PTC16/UART3_RX/ENET0_1588_TMR0/)
N26833: J4.2(GPIO2) U5.91(PTC17/UART3_TX/ENET0_1588_TMR1/)
N26835: J4.3(GPIO3) U5.1(PTE0/ADC1_SE4A/SPI1_PCS1/UART1_)
N28499: J5.1(GPIO1) U5.2(PTE1/LLWU_P0/ADC1_SE5A/SPI1_SOU)
N28501: J5.2(GPIO2) U5.3(PTE2/LLWU_P1/ADC0_DP2/ADC1_SE6A)
N28503: J5.3(GPIO3) U5.4(PTE3/ADC0_DM2/ADC1_SE7A/SPI1_SI)
N29732: J3.1(GPIO1) U5.64(PTB18/CAN0_TX/FTM2_CH0/I2S0_TX_)
N33119: DS2.2(A) R2.1
N33141: DS3.2(A) R3.1
N33179: DS1.2(A) R1.1
N58139: U5.27(DAC0_OUT/CMP1_IN3/ADC0_SE23) W1.1
N59301: R4.1 SW2.2 U5.57(PTB9/SPI1_PCS1/UART3_CTS_B/FB_A)

Pads without a net: AE1 2; AE2 2; J7 7; SW1 3; U2 7 19 21; U7 6 9 10 16 24

## Via types
v1: diameter 0.61, hole 0.305, TOP to BOTTOM, 505 vias

## Routing (per net, layer and track width the routed paths; a pad name or vN(x,y) marks a point on that pad's centre or on a via; arc(x,y) is an arc through that point)
GND: length 272.2
  TOP w0.152: U3.20 35.96,47.14 36.36,46.74 37.05,46.74 37.46,47.14 ; v1(24.21,35.28) 24,35.48 U5.88 24,37.48 24.17,37.65 C23.2 ; U5.60 32.72,27.33 32.84,27.21 C26.2 ; U5.9 15.33,30.83 15.16,30.66 C21.2 ; v1(43.48,11.99) 43.47,11.99 43.34,11.86 C18.2 C17.2 43.33,10.1 ; R18.1 42.81,16.63 42.93,16.51 ; U3.17 37.46,47.14 ; 37.46,47.14 38.3,46.3 U3.14 ; U4.37 44.51,6.77 v1(43.71,5.97) ; C12.2 v1(42.98,44.5) ; v1(34.29,34.16) 33.43,34.16 C25.2 32.84,34.17 32.68,34.33 U5.74 ; C8.2 37.64,49.28 v1(37.64,49.99) ; C7.2 35.31,44.19 v1(35.33,44.17) 35.69,44.53 36.65,44.53 36.96,44.22 U3.8 ; C13.2 v1(42.98,43.48) ; Y1.2 40.79,39.73 40.79,39.73 v1(41.02,39.73) ; R14.1 45.01,11.91 45,11.92 v1(45,11.99) ; R15.1 42.42,11.76 42.38,11.79 42.38,11.91 v1(42.36,11.93) ; U2.14 U2.15 ; U5.24 U5.25 ; 29.61,19.96 29.61,19.99 29.5,20.1 U5.49 ; v1(31.04,20.36) 31.04,19.69 Y2.2 ; v1(24.61,17.02) 24.25,16.65 U2.18 ; C9.2 34.19,49.1 C16.2 35.36,49.27 v1(35.36,49.99) ; v1(43.71,5.97) U4.39 ; v1(43.71,5.97) U4.17 ; W3.1 10.69,42.55 R5.1 R6.1 8.19,42.55 8.18,42.55 v1(8.1,42.55) ; Y1.4 34.54,41.93 v1(34.16,41.55) 34.16,40.51 C14.2 ; U2.6 U2.5 ; C15.2 v1(41.15,40.49) ; v1(25.65,18.59) 25.65,19.37 C24.2 25.62,19.99 25.5,20.11 U5.41 ; v1(38.4,49.99) 38.4,49.22 R13.1 ; U2.9 22.63,12.92 C5.2 22.76,12.8 v1(22.76,11.99) ; C11.2 v1(43.69,47.57) ; v1(5.46,6.78) 5.84,7.16 6.66,7.16 L7.1 ; U1.11 9.04,45.59 U1.3 9.04,47.6 9.11,47.67 9.11,47.7 v1(9.47,48.06) ; DS1.1 2.03,34.8 v1(1.4,35.43) ; U2.20 23.43,17.21 23.49,17.27 ; U2.2 U2.3
  TOP w0.406: 18.52,8.22 U8.4 ; U8.4 18.97,9.09 ; U8.4 18.06,9.09 ; U8.4 18.52,9.97 ; J3.9 27.94,2.46 ; J3.9 29.01,1.4 ; J3.9 26.87,1.4 ; 15.14,23.17 C19.2 14.58,22.74 ; 21.8,15.07 U2.4 21.06,15.07 ; 46.73,19.68 J7.9 ; J7.9 48.3,20.24 ; J7.9 49.88,19.68 ; Y4.2 5.7,15.6 ; Y4.2 4.12,15.6 ; Y4.2 4.91,16.79 ; Y4.2 4.91,14.42 ; J5.8 1.4,26.47 ; J5.8 1.4,24.33 ; J5.8 2.46,25.4 ; C20.2 14.1,22.73 ; C20.2 13.41,22.07 ; C20.2 13.41,23.39 ; J6.9 49.4,29.01 ; J6.9 49.4,26.87 ; J6.9 48.34,27.94 ; C4.2 25.88,15.01 ; C4.2 24.76,15.01 ; C4.2 25.32,15.44 ; Q1.2 39.71,32.14 ; Q1.2 39.14,32.77 ; Q1.2 38.57,32.14 ; C27.2 34.59,27.41 ; C27.2 33.91,26.75 ; C27.2 35.28,26.75 ; 3.73,10.24 C38.2 4.16,9.68 ; 15.03,43.17 J2.2 ; J2.2 15.84,43.98 ; J2.2 14.21,43.98 ; J2.2 15.03,44.8 ; SW2.1 36.27,23.31 ; SW2.1 35.15,22.99 ; SW2.1 35.96,22.18 ; 37.46,48.54 C8.2 ; C8.2 37.46,49.66 ; C8.2 37.89,49.1 ; J7.3 48.3,16.43 ; J7.3 49.88,15.87 ; J7.3 46.73,15.87 ; J5.7 1.4,29.01 ; J5.7 2.46,27.94 ; J5.7 1.4,26.87 ; 24.62,15.87 U2.17 23.88,15.87 ; 21.8,15.47 U2.3 21.06,15.47 ; 24.62,15.47 U2.16 23.88,15.47 ; C28.2 14.1,30.25 ; C28.2 12.72,30.25 ; C28.2 13.41,30.91 ; C28.2 13.41,29.59 ; 42.27,5.97 v1(43.71,5.97) 45.16,5.97 ; J3.7 22.86,2.46 ; J3.7 23.93,1.4 ; J3.7 21.79,1.4 ; 38.4,39.73 Y1.2 ; Y1.2 39.58,38.94 ; Y1.2 39.58,40.52 ; C1.2 11.76,45 ; C1.2 10.64,45 ; C1.2 11.2,45.43 ; J3.8 25.4,2.46 ; J3.8 26.47,1.4 ; J3.8 24.33,1.4 ; J5.9 1.4,23.93 ; J5.9 2.46,22.86 ; J5.9 1.4,21.79 ; 2.9,8.89 C33.2 ; C33.2 4.22,8.89 ; C33.2 3.56,8.2 ; C33.2 3.56,9.58 ; 13.77,5.9 R24.1 14.33,6.33 ; 33.99,34.17 C25.2 33.43,33.74 ; J1.2 5.21,46.96 ; J1.2 4.42,46.18 ; J1.2 3.63,46.96 ; C9.2 33.91,49.48 ; C9.2 33.22,48.82 ; C9.2 34.6,48.82 ; C9.2 33.91,48.16 ; R13.1 38.53,49.52 ; R13.1 39.09,49.09 ; R13.1 37.97,49.09 ; 6.18,10.16 R27.1 6.61,10.72 ; C22.2 30.04,19.41 ; C22.2 29.61,18.85 ; C22.2 29.61,19.96 ; 46.73,17.14 J7.5 ; J7.5 49.88,17.14 ; J7.5 48.3,16.59 ; W3.1 11.79,42.04 ; W3.1 10.62,42.04 ; W3.1 11.2,41.45 ; 24.62,15.07 U2.15 23.88,15.07 ; 9.94,7.48 L6.1 10.03,8.18 ; 35.19,48.54 C16.2 35.19,49.66 ; C34.2 18.01,7.47 ; C34.2 17.35,6.78 ; C34.2 18.01,6.1 ; C34.2 18.67,6.78 ; 16.25,22.5 U5.25 ; U5.25 17.13,22.83 ; U5.25 15.38,22.83 ; 23.65,11.74 C6.2 23.09,12.17 ; 27.94,48.34 J4.7 ; J4.7 26.87,49.4 ; J4.7 29.01,49.4 ; 12.19,6.33 R23.1 12.75,5.9 ; 10.64,46.18 C3.2 ; C3.2 11.2,45.75 ; C3.2 11.76,46.18 ; Y4.4 3.5,11.9 ; Y4.4 2.71,13.09 ; Y4.4 2.71,10.72 ; Y4.4 1.92,11.9 ; 3.89,17.27 C39.2 3.46,17.83 ; 49.4,21.79 J6.7 ; J6.7 48.34,22.86 ; J6.7 49.4,23.93 ; 49.4,24.33 J6.8 ; J6.8 49.4,26.47 ; J6.8 48.34,25.4 ; 21.06,14.67 U2.5 21.8,14.67 ; 14.53,6.33 C36.2 15.09,5.9 ; 22.86,48.34 J4.9 ; J4.9 23.93,49.4 ; J4.9 21.79,49.4 ; 34.29,44.62 C7.2 33.73,44.19 ; 24.33,49.4 J4.8 ; J4.8 25.4,48.34 ; J4.8 26.47,49.4 ; 4.07,7.19 C35.2 3.64,7.75 ; 10.22,45.59 U1.11 7.86,45.59
  GND w0.406: 21.79,49.4 J4.9 ; J4.9 23.93,49.4 ; J4.9 22.86,48.34 ; 49.4,24.33 J6.8 ; J6.8 49.4,26.47 ; J6.8 48.34,25.4 ; 3.63,46.96 J1.2 ; J1.2 4.42,47.75 ; J1.2 5.21,46.96 ; J1.2 4.42,46.18 ; 49.4,21.79 J6.7 ; J6.7 49.4,23.93 ; J6.7 48.34,22.86 ; J4.8 26.47,49.4 ; J4.8 25.4,48.34 ; J4.8 24.33,49.4 ; 1.4,26.87 J5.7 ; J5.7 2.46,27.94 ; J5.7 1.4,29.01 ; 14.21,43.98 J2.2 ; J2.2 15.03,44.8 ; J2.2 15.84,43.98 ; J2.2 15.03,43.17 ; 21.79,1.4 J3.7 ; J3.7 22.86,2.46 ; J3.7 23.93,1.4 ; 11.2,41.45 W3.1 ; W3.1 11.79,42.04 ; W3.1 10.62,42.04 ; 26.87,1.4 J3.9 ; J3.9 27.94,2.46 ; J3.9 29.01,1.4 ; J5.9 1.4,23.93 ; J5.9 2.46,22.86 ; J5.9 1.4,21.79 ; 26.87,49.4 J4.7 ; J4.7 27.94,48.34 ; J4.7 29.01,49.4 ; J3.8 26.47,1.4 ; J3.8 24.33,1.4 ; J3.8 25.4,2.46 ; J6.9 49.4,29.01 ; J6.9 49.4,26.87 ; J6.9 48.34,27.94 ; J5.8 1.4,26.47 ; J5.8 1.4,24.33 ; J5.8 2.46,25.4
  BOTTOM w0.406: J3.9 29.01,1.4 ; J3.9 27.94,2.46 ; J3.9 26.87,1.4 ; 10.62,42.04 W3.1 ; W3.1 11.2,41.45 ; W3.1 11.79,42.04 ; 21.79,1.4 J3.7 ; J3.7 23.93,1.4 ; J3.7 22.86,2.46 ; 27.94,48.34 J4.7 ; J4.7 29.01,49.4 ; J4.7 26.87,49.4 ; J3.8 26.47,1.4 ; J3.8 24.33,1.4 ; J3.8 25.4,2.46 ; 1.4,26.87 J5.7 ; J5.7 2.46,27.94 ; J5.7 1.4,29.01 ; 49.4,26.87 J6.9 ; J6.9 49.4,29.01 ; J6.9 48.34,27.94 ; J6.7 49.4,23.93 ; J6.7 49.4,21.79 ; J6.7 48.34,22.86 ; 49.4,24.33 J6.8 ; J6.8 48.34,25.4 ; J6.8 49.4,26.47 ; 3.63,46.96 J1.2 ; J1.2 4.42,47.75 ; J1.2 4.42,46.18 ; J1.2 5.21,46.96 ; J5.9 1.4,23.93 ; J5.9 2.46,22.86 ; J5.9 1.4,21.79 ; J2.2 15.84,43.98 ; J2.2 15.03,44.8 ; J2.2 15.03,43.17 ; J2.2 14.21,43.98 ; J5.8 1.4,26.47 ; J5.8 1.4,24.33 ; J5.8 2.46,25.4 ; 26.47,49.4 J4.8 24.33,49.4 ; 21.79,49.4 J4.9 23.93,49.4
  vias: v1(0.89,18.21) v1(0.89,17.45) v1(0.89,16.69) v1(0.89,15.93) v1(0.89,15.16) v1(0.89,14.4) v1(0.89,13.64) v1(0.89,12.88) v1(0.89,12.12) v1(0.89,11.35) v1(0.89,10.59) v1(0.89,9.83) v1(0.89,9.07) v1(0.89,8.31) v1(0.89,7.54) v1(0.89,6.78) v1(0.89,6.02) v1(1.37,40.16) v1(1.42,30) v1(1.65,18.21) v1(1.65,6.78) v1(2.41,18.21) v1(2.41,6.78) v1(2.41,5.46) v1(2.79,13.72) v1(3.17,18.21) v1(3.17,6.78) v1(3.17,5.46) v1(3.78,11.89) v1(3.94,18.21) v1(3.94,6.78) v1(3.94,5.46) v1(4.32,17.27) v1(4.7,18.21) v1(4.7,6.78) v1(4.7,5.46) v1(4.85,45.03) v1(5.13,24.13) v1(5.16,26.7) v1(5.46,18.21) v1(5.46,5.46) v1(5.79,35.18) v1(5.8,10.16) v1(6.22,18.21) v1(6.22,5.46) v1(6.6,4.83) v1(6.6,4.06) v1(6.6,3.3) v1(6.6,2.54) v1(6.6,1.78) v1(6.6,1.02) v1(6.83,39.57) v1(6.98,5.46) v1(7.19,45.31) v1(7.75,5.46) v1(7.95,18.21) v1(7.95,17.45) v1(7.95,16.69) v1(8.33,49.45) v1(8.51,5.46) v1(8.71,17.2) v1(8.81,41.73) v1(9.35,19.38) v1(9.27,5.46) v1(9.47,17.2) v1(10.03,5.46) v1(10.24,17.2) v1(10.49,11.66) v1(10.57,27.2) v1(10.72,7.77) v1(10.79,5.46) v1(10.9,1.45) v1(11,17.2) v1(11.56,5.46) v1(12.32,5.46) v1(12.9,9.27) v1(13.07,17.2) v1(13.08,5.46) v1(13.54,25.5) v1(13.83,17.2) v1(13.84,5.46) v1(14.12,36.25) v1(14.3,7.87) v1(14.38,22.45) v1(14.59,17.2) v1(14.6,5.46) v1(14.83,48.64) v1(14.94,11.48) v1(15.04,20.9) v1(15.14,41.91) v1(15.27,1.45) v1(15.35,17.2) v1(15.37,5.46) v1(16.12,17.2) v1(16.1,12.8) v1(16.13,5.46) v1(16.61,20.04) v1(16.66,10.26) v1(16.81,21.69) v1(16.88,17.2) v1(16.89,5.46) v1(17.17,12.85) v1(17.42,30.1) v1(17.6,38.25) v1(17.64,17.2) v1(17.65,5.46) v1(18.4,17.2) v1(18.41,5.46) v1(18.52,48.77) v1(19.23,34.82) v1(19.16,17.2) v1(19.18,16.13) v1(19.18,15.37) v1(19.18,7.75) v1(19.18,6.98) v1(19.18,6.22) v1(19.18,5.46) v1(19.56,14.6) v1(19.56,13.84) v1(19.56,13.08) v1(19.56,12.32) v1(19.56,11.56) v1(19.56,10.79) v1(19.56,10.03) v1(19.56,9.27) v1(19.56,8.51) v1(20.09,45.8) v1(20.24,39.55) v1(20.32,35.38) v1(20.35,32.13) v1(20.65,17.45) v1(20.78,15.34) v1(21.01,8.59) v1(21.01,5.38) v1(21.46,47.5) v1(21.46,35.25) v1(21.62,46.25) v1(21.72,30.35) v1(21.74,25.76) v1(22.12,10.97) v1(24.13,5.05) v1(24.16,46.23) v1(26.06,45.57) v1(26.14,15.04) v1(26.59,5.05) v1(27.51,34.24) v1(27.51,32.23) v1(28.02,18.29) v1(28.88,45.57) v1(29.03,5.49) v1(29.21,26.67) v1(29.62,40.39) v1(29.72,18.59) v1(29.79,5.49) v1(30.56,4.72) v1(30.56,3.96) v1(30.89,12.45) v1(31.04,18.17) v1(31.32,3.96) v1(32.08,3.2) v1(32.08,2.44) v1(32.31,49.99) v1(32.31,49.23) v1(32.31,48.46) v1(32.31,47.7) v1(32.31,46.94) v1(32.31,44.58) v1(32.31,43.84) v1(32.31,43.08) v1(32.31,42.32) v1(32.31,41.55) v1(32.31,40.79) v1(32.31,40.03) v1(32.31,39.27) v1(32.28,20.5) v1(32.77,38.63) v1(32.84,2.44) v1(32.91,19.66) v1(32.87,14.58) v1(33.07,49.99) v1(33.4,26.52) v1(33.4,25.25) v1(33.55,16.59) v1(33.6,1.68) v1(33.6,0.91) v1(33.83,49.99) v1(33.86,38.63) v1(34.37,0.91) v1(34.59,49.99) v1(34.62,38.63) v1(35.38,38.63) v1(36.12,49.99) v1(36.14,38.63) v1(36.07,34.01) v1(36.17,40.84) v1(36.88,49.99) v1(36.91,38.63) v1(37.67,38.63) v1(38,41.17) v1(38.43,38.63) v1(39.17,49.99) v1(39.19,38.63) v1(39.93,49.99) v1(39.95,38.63) v1(40.23,30) v1(40.69,49.99) v1(40.72,38.63) v1(40.89,9.42) v1(41.15,47.7) v1(41.12,30.15) v1(41.45,49.99) v1(41.48,38.63) v1(42.21,49.99) v1(42.24,38.63) v1(42.98,49.99) v1(43,38.63) v1(43.59,29.9) v1(43.74,49.99) v1(43.69,49.1) v1(43.69,48.34) v1(43.84,41.2) v1(43.76,38.63) v1(44.5,49.99) v1(44.53,38.63) v1(44.48,36.37) v1(44.6,32.94) v1(44.86,39.32) v1(45.26,49.99) v1(45.26,48.46) v1(45.26,47.7) v1(45.26,46.94) v1(45.26,46.18) v1(45.26,45.42) v1(45.26,44.65) v1(45.26,43.89) v1(45.26,43.13) v1(45.26,42.37) v1(45.26,41.61) v1(45.26,40.84) v1(45.26,40.08) v1(45.29,38.63) v1(45.49,26.75) v1(45.49,24.13) v1(46.02,43.89) v1(46.05,38.63) v1(46.35,19.05) v1(46.35,16.51) v1(46.79,43.89) v1(46.81,38.63) v1(47.55,43.89) v1(47.57,38.63) v1(48.31,43.89) v1(48.34,38.63) v1(49.07,43.89) v1(49.1,38.63) v1(49.2,41.3) v1(49.38,4.19) v1(49.66,12.62) v1(49.83,43.89) v1(49.86,38.63) v1(49.96,0.84)
PGND: length 13.4
  TOP w0.152: v1(5.33,36.14) 5.33,36.22 5.35,36.23 R22.1 ; v1(2.08,36.4) 2.08,35.89 2.44,35.53 3.15,35.53 3.44,35.25 3.44,34.02 3.33,33.91 DS16.1 ; 9.14,38.35 v1(8.64,37.85)
  TOP w0.381: U6.4 9.14,38.35
  BOTTOM w0.152: v1(8.25,37.08) 8.25,36.42 8.1,36.27 6.35,36.27 6.22,36.14 v1(5.33,36.14) 2.84,36.14 2.59,36.4 v1(2.08,36.4)
  vias: v1(8.25,38.61) v1(9.02,38.61) v1(9.02,37.08)
VBAT: length 1
  TOP w0.152: v1(6.2,37.69) 6.35,37.85 U6.8
  vias: v1(5.08,40) v1(5.84,40) v1(10.83,40.42) v1(11.6,40.42)
VCC: length 134.9
  TOP w0.152: U7.11 v1(13.53,10.91) ; DS14.4 42.74,24.31 42.91,24.13 v1(43.74,24.13) ; DS13.4 42.99,22.29 43.84,21.44 v1(43.94,21.44) ; U3.15 39.18,46.8 v1(39.42,47.04) ; v1(32.88,18.8) 32.23,18.8 Y2.4 ; DS4.4 28.51,42.99 v1(29.84,44.32) ; R21.2 6.12,34.06 v1(6.35,34.29) ; U6.10 v1(7.16,35.71) ; R4.2 36.91,26.24 34.62,28.52 C27.1 34.03,27.96 33.5,27.96 ; U5.61 32.71,27.83 32.84,27.96 C26.1 33.5,27.96 ; v1(49.25,13.74) 48.58,13.74 48.3,14.02 J7.1 ; C23.1 23.43,37.56 23.5,37.48 U5.89 23.5,35.49 23.49,35.48 v1(23.49,34.98) ; R10.2 29.69,16.5 v1(29.69,16.51) ; v1(7.06,29.21) 7.89,29.21 8.06,29.03 DS7.4 ; U7.17 13.15,13.96 13.16,13.97 v1(13.67,13.97) ; U7.3 U7.4 10.24,9.12 v1(10.69,8.67) ; v1(43.74,26.67) 42.91,26.67 42.74,26.85 DS15.4 ; U8.8 14.71,13.6 v1(15.34,12.97) ; DS5.4 26.49,42.74 26.67,42.91 v1(26.67,43.74) ; U7.29 v1(7.41,11.41) 7.41,11.28 7.79,10.91 U7.30 ; v1(22.91,17.37) 22.91,17.22 22.63,16.95 U2.22 ; DS12.4 21.77,8.06 21.59,7.89 v1(21.59,7.06) ; R16.1 42.29,20.7 42.21,20.78 42.21,20.88 42.17,20.93 v1(42.17,21.13) ; v1(6.35,31.75) 6.12,31.98 R3.2 ; R2.2 v1(6.35,33.02) ; v1(34.92,47.62) 34.92,47.32 34.65,47.04 C9.1 ; v1(11.81,23.69) 11.81,23.49 11.89,23.42 L4.2 ; C21.1 15.16,31.41 15.25,31.33 U5.8 ; C21.1 14.03,31.41 C28.1 ; C21.1 v1(14.58,32.1) ; U4.38 44.11,8.7 44.09,8.73 C17.1 C18.1 44.09,11.78 v1(44.24,11.94) ; DS6.4 23.95,42.74 24.13,42.91 v1(24.13,43.74) ; v1(26.67,7.06) 26.67,7.81 26.92,8.06 DS10.4 ; U5.40 25,20.12 24.87,19.99 C24.1 v1(24.87,18.61) ; R19.1 42.29,13.37 v1(42.35,13.3) ; v1(33.27,28.65) 33.63,28.29 33.63,28.09 33.5,27.96 ; DS8.4 8.06,26.49 7.89,26.67 v1(7.06,26.67) ; v1(36.25,43) 36.25,43.1 36.46,43.31 U3.7 ; v1(8.36,8.89) 8.36,8.9 8.74,9.28 U7.1 ; v1(27.41,16.51) 27.41,16.5 R11.2 ; DS11.4 24.31,8.06 24.13,7.89 v1(24.13,7.06) ; v1(7.06,24.13) 7.89,24.13 8.06,23.95 DS9.4 ; v1(26.14,14.27) 26.04,14.27 26.02,14.26 C4.1 24.65,14.26 24.64,14.27 U2.13 ; v1(6.3,8.33) 6.3,8.53 6.61,8.85 R25.2 6.36,8.89 C33.1 4.82,8.38 C35.1 4.92,7.65 5.13,7.65 5.44,7.95 v1(5.51,7.95) ; v1(28.91,18.59) 28.91,18.72 28.86,18.76 C22.1 28.86,20.04 29,20.18 U5.48 ; v1(22,11.99) 22,12.01 22,12.02 C5.1 22,13.23 22.23,13.46 U2.8 ; U5.30 20,22.21 v1(19.94,22.28) ; U2.1 20.89,16.27 20.88,16.26 v1(20.81,16.26) ; C8.1 36.7,49.09 v1(36.7,48.29) 36.7,48.26 36.96,48 U3.18 ; C7.1 34.97,43.44 34.98,43.43 v1(35.1,43.43) ; C36.1 v1(15.09,7.87) ; v1(38.43,37.87) 38.58,37.87 38.59,37.87 R7.2 ; R17.1 41.6,17.66 v1(41.48,17.78) ; U5.75 32.65,34.83 32.74,34.92 C25.1 34.28,34.92 v1(34.29,34.92) ; C34.1 v1(16.23,7.85)
  TOP w0.386: LS1.2 v1(47.42,34.16)
  PWR w0.406: J3.4 23.93,3.94 ; J3.4 21.79,3.94 ; J3.4 22.86,5 ; J3.4 22.86,2.87 ; 3.94,26.87 J5.4 ; J5.4 3.94,29.01 ; J5.4 2.87,27.94 ; J5.4 5,27.94 ; J3.5 26.47,3.94 ; J3.5 25.4,5 ; J3.5 25.4,2.87 ; J3.5 24.33,3.94 ; J6.4 47.93,22.86 ; J6.4 46.86,23.93 ; J6.4 45.8,22.86 ; J6.4 46.86,21.79 ; 26.87,46.86 J4.4 ; J4.4 27.94,45.8 ; J4.4 27.94,47.93 ; J4.4 29.01,46.86 ; 45.8,25.4 J6.5 ; J6.5 46.86,26.47 ; J6.5 46.86,24.33 ; J6.5 47.93,25.4 ; J3.6 27.94,5 ; J3.6 27.94,2.87 ; J3.6 26.87,3.94 ; J3.6 29.01,3.94 ; J5.6 5,22.86 ; J5.6 3.94,21.79 ; J5.6 3.94,23.93 ; J5.6 2.87,22.86 ; 45.8,27.94 J6.6 ; J6.6 46.86,26.87 ; J6.6 47.93,27.94 ; J6.6 46.86,29.01 ; 25.4,45.8 J4.5 ; J4.5 26.47,46.86 ; J4.5 25.4,47.93 ; J4.6 23.93,46.86 ; J4.6 22.86,45.8 ; J4.6 22.86,47.93 ; 2.87,25.4 J5.5 ; J5.5 3.94,26.47 ; J5.5 3.94,24.33 ; J5.5 5,25.4
  vias: v1(11.68,36.17) v1(11.68,35.41) v1(11.68,34.65) v1(11.68,33.88) v1(11.68,33.12) v1(11.68,32.36)
#CS: length 13.9
  TOP w0.152: U7.20 10.74,14.58 11.02,14.86 11.4,14.86 11.9,15.35 14.28,15.35 14.64,15.71 15.08,15.71 15.63,15.16 16.07,15.16 16.36,15.16 16.64,14.88 16.64,11.99 14.71,10.06 U8.1
#HOLD: length 6
  TOP w0.152: v1(14.86,15.18) 15.22,14.82 15.22,14.8 15.24,14.78 15.24,14.27 15.49,14.02 U8.7 ; v1(13.07,14.5) 11.9,14.5 11.74,14.33 U7.18
  BOTTOM w0.152: v1(13.07,14.5) 13.58,14.5 13.58,14.5 13.89,14.5 13.89,14.5 14.69,14.5 14.86,14.67 v1(14.86,15.18)
#RST: length 16.2
  TOP w0.152: U5.52 33.38,23.33 33.73,22.98 33.73,22.66 33.91,22.48 33.91,22.23 34.2,21.94 34.2,21.62 35.08,20.74 35.08,19.61 35.64,19.05 36.9,19.05 37.23,18.72 41.19,18.72 42.16,19.69 R16.2 42.3,19.68 J7.10
#WP: length 10.8
  TOP w0.152: v1(15.9,12.01) 15.4,12.01 14.2,13.21 14.2,14.48 13.63,15.05 12.03,15.05 11.24,14.27 U7.19 ; U8.3 17.25,10.67 v1(16.87,11.04)
  BOTTOM w0.152: v1(16.87,11.04) v1(15.9,12.01)
CHG_OUT: length 3.3
  PWR w0.406: J2.1 17.84,43.98 ; J2.1 16.21,43.98 ; J2.1 17.03,43.17 ; J2.1 17.03,44.8
  vias: v1(3.28,41.53) v1(4.04,41.53) v1(4.8,41.53) v1(12.19,44.2) v1(12.95,44.2)
CLK: length 8
  TOP w0.152: U8.6 17.25,15.14 16.92,15.47 15.75,15.47 15.21,16.01 14.51,16.01 14.16,15.66 11.64,15.66 11.45,15.47 R26.2
DI: length 13.5
  TOP w0.152: U7.23 9.24,15.86 9.77,16.38 11.53,16.38 11.64,16.27 13.9,16.27 14.26,16.62 15.46,16.62 16.01,16.08 17.96,16.08 18.52,15.52 U8.5
DO: length 17.6
  TOP w0.152: U7.22 9.74,15.93 9.89,16.08 11.4,16.08 11.52,15.96 14.03,15.96 14.39,16.32 15.33,16.32 15.88,15.77 17.1,15.77 17.84,15.03 17.84,12.76 15.98,10.9 U8.2
EN_B: length 36.1
  TOP w0.152: U5.83 26.5,33.56 24.39,31.45 24.39,31.27 v1(24.03,30.91) ; U1.4 v1(8.54,47.9)
  BOTTOM w0.152: v1(24.03,30.91) 24,30.94 24,31.79 23.77,32.02 23.77,32.61 22.91,33.48 22.91,36.07 19.18,39.8 19.18,45.29 17.65,46.81 17.14,46.81 17.12,46.79 8.97,46.79 8.54,47.21 v1(8.54,47.9)
FSYNC: length 13.8
  TOP w0.152: v1(25.61,12.44) 25.56,12.5 24.71,12.5 TP3.1 24.66,13.06 24.27,13.44 23.64,13.44 23.43,13.65 U2.11 ; v1(23.63,19.09) 23.99,19.44 23.99,19.62 24.5,20.13 U5.39
  BOTTOM w0.152: v1(23.63,19.09) 23.63,18.57 23.62,18.56 23.62,18.12 24.05,17.69 24.05,12.59 24.21,12.44 v1(25.61,12.44)
IMU_INT: length 16.3
  TOP w0.152: v1(26.54,12.55) 26.18,12.91 26.18,13.19 26.04,13.33 TP4.1 24.82,13.33 24.29,13.86 U2.12 ; U5.38 24,20.22 23.6,19.81 v1(23.4,19.81)
  BOTTOM w0.152: v1(26.54,12.55) 25.96,11.96 25.95,11.96 25.87,11.89 24.13,11.89 23.75,12.27 23.75,17.56 23.32,17.99 23.32,18.65 23.04,18.92 23.04,19.45 v1(23.4,19.81)
LED1: length 19
  TOP w0.152: v1(17.44,32.49) 17.44,32.48 17.29,32.33 U5.6 ; DS2.1 2.96,33.02 3.45,32.53 3.45,31.73 3.45,31.73 3.45,31.47 v1(3.81,31.11)
  BOTTOM w0.152: v1(17.44,32.49) 17.44,31.95 15.57,30.07 11.23,30.07 10.59,30.71 4.9,30.71 4.5,31.11 v1(3.81,31.11)
LED2: length 18.5
  TOP w0.152: U5.7 17.24,31.83 17.42,31.65 v1(17.42,31.14) ; v1(4.14,30.4) 3.51,30.4 2.87,31.04 DS3.1
  BOTTOM w0.152: v1(4.14,30.4) 10.46,30.4 11.1,29.77 16.05,29.77 v1(17.42,31.14)
MESH_#CS: length 14.1
  TOP w0.152: U5.76 30,38 29.51,38.49 29.51,39.01 29.77,39.27 29.77,39.62 30.15,40 30.15,40.44 30.23,40.51 TP6.1 30.86,41.94 30.86,45.19 31.7,46.02 34.64,46.02 34.91,46.3 U3.2
MESH_CE: length 15.3
  TOP w0.152: U3.1 34.83,46.8 34.65,46.61 34.65,46.46 34.51,46.33 31.57,46.33 30.56,45.31 30.56,43.13 30.45,43.03 30.45,42.39 30.1,42.04 29.62,41.55 29.62,41.14 29.03,40.56 TP5.1 28.6,39.24 28.22,39.24 28,39.03 U5.80
MESH_IRQ: length 17.3
  TOP w0.152: U3.6 35.96,43.48 35.37,42.9 33.45,42.9 33.3,42.75 33.3,37.39 TP10.1 35.23,35.46 35.23,33.58 34.95,33.3 33.18,33.3 32.65,33.83 U5.73
MISO0: length 17.4
  TOP w0.152: U3.5 34.75,44.8 34.62,44.93 34.62,44.98 34.49,45.11 32.08,45.11 31.78,44.81 31.78,39.24 31.6,39.07 TP9.1 30.78,37.67 30.78,35.33 30.45,35 28.8,35 28.5,35.31 28.5,35.67 28.5,35.68 U5.79
MOSI0: length 16.6
  TOP w0.152: U5.78 29,35.68 29.01,35.67 29.01,35.48 29.18,35.31 30.33,35.31 30.48,35.46 30.48,37.79 30.84,38.15 TP8.1 31.47,39.88 31.47,44.93 31.95,45.42 34.63,45.42 34.75,45.3 U3.4
PTA0/JTAG_TCLK/SWD_CLK/EZP_CLK/: length 29
  TOP w0.152: v1(33.06,21.47) 34.16,20.36 34.16,18.75 34.77,18.14 36.52,18.14 36.86,17.8 40.27,17.8 41.53,16.54 41.53,16.06 41.71,15.88 R18.2 42.3,15.87 J7.4 ; v1(30.02,23.19) 29.06,24.16 28.33,24.16 28.23,24.26 27.15,24.26 27.13,24.28 25.92,24.28 25.9,24.26 25.79,24.26 24.47,22.94 22.96,22.94 22,21.98 U5.34
  BOTTOM w0.152: v1(33.06,21.47) 32.51,21.47 32.16,21.81 31.4,21.81 v1(30.02,23.19)
PTA1/JTAG_TDI/EZP_DI/UART0_RX/F: length 27.8
  TOP w0.152: 44.41,18.41 42.3,18.41 R17.2 37.11,18.41 36.78,18.75 35.33,18.75 34.77,19.3 34.77,20.61 33.89,21.49 33.89,21.81 33.6,22.1 33.6,22.35 v1(33.2,22.76) ; v1(28.56,23.62) 28.03,23.62 27.7,23.95 27.03,23.95 27,23.98 26.05,23.98 26.03,23.95 25.92,23.95 24.6,22.63 23.15,22.63 22.5,21.98 U5.35
  BOTTOM w0.152: v1(33.2,22.76) 32.53,22.76 32.19,22.42 31.66,22.42 30.86,23.21 30.86,23.54 30.37,24.03 29.68,24.03 29.27,23.62 v1(28.56,23.62)
PTA2/JTAG_TDO/TRACE_SWO/EZP_D0/: length 27.9
  TOP w0.152: U5.36 23,21.98 23.35,22.33 24.72,22.33 26.04,23.65 26.15,23.65 26.18,23.67 26.87,23.67 26.9,23.65 27.57,23.65 27.72,23.49 27.72,23.41 28.21,22.92 29,22.92 29.05,22.87 v1(29.19,22.87) ; J7.6 41.36,17.14 40.4,18.1 36.99,18.1 36.65,18.44 35,18.44 34.47,18.97 34.47,20.49 33.59,21.36 33.59,21.69 33.16,22.12 v1(32.64,22.12)
  BOTTOM w0.152: v1(32.64,22.12) 31.53,22.12 30.56,23.09 30.56,23.41 30.24,23.72 29.8,23.72 29.49,23.41 29.49,23.34 29.19,23.04 v1(29.19,22.87)
PTA3/JTAG_TMS/SWD_DIO/UART0_RTS: length 27.3
  TOP w0.152: U5.37 23.5,21.87 23.66,22.02 24.85,22.02 26.17,23.34 26.28,23.34 26.3,23.37 26.75,23.37 26.77,23.34 27.35,23.34 28.09,22.61 28.54,22.61 28.78,22.38 28.78,22.37 28.91,22.23 v1(29.67,22.23) ; v1(33.13,20.64) 33.86,19.91 33.86,18.52 34.54,17.83 36.4,17.83 36.73,17.49 40.06,17.49 41.22,16.33 41.22,15.93 41.92,15.24 42.16,15.24 42.29,15.11 R19.2 44.4,14.6 J7.2
  BOTTOM w0.152: v1(29.67,22.23) 30.55,22.23 31.28,21.51 31.96,21.51 32.45,21.01 32.75,21.01 v1(33.13,20.64)
PTA18/EXTAL0/FTM0_FLT2/FTM_CLKI: length 3.1
  TOP w0.152: U5.50 30.38,21.08 30.51,20.96 30.51,19.04 30.67,18.88 Y2.3
PTA19/XTAL0/FTM1_FLT0/FTM_CLKIN: length 4.4
  TOP w0.152: Y2.1 32.1,19.68 31.57,20.2 31.57,21.16 30.89,21.84 30.89,22.51 31.21,22.83 U5.51
SCK0: length 14.9
  TOP w0.152: U5.77 29.5,37.93 v1(28.75,38.68) ; v1(30.07,38.68) 30.07,39.5 TP7.1 31.17,40.59 31.17,45.06 31.83,45.72 34.76,45.72 34.84,45.8 U3.3
  BOTTOM w0.152: v1(30.07,38.68) v1(28.75,38.68)
SCL2: length 35.4
  TOP w0.152: 26.29,17.73 26.29,19.84 26,20.12 U5.42 ; 26.29,17.73 23.31,17.73 23.13,17.91 22.69,17.91 22.23,17.45 U2.23 ; 26.29,17.73 27.03,17.73 27.66,17.1 27.67,17.1 27.69,17.07 v1(28.2,17.07) 28.2,16.41 28.16,16.37 R11.1 28.16,15.13 TP2.1 ; v1(30.61,16.89) 31.11,16.89 31.45,17.22 36.14,17.22 36.48,16.88 39.81,16.88 40.61,16.08 40.61,15.68 41.38,14.92 41.38,13.37 41.44,13.31 41.44,10.08 41.81,9.72 41.81,9.7 42.52,8.99 U4.42
  BOTTOM w0.152: v1(28.2,17.07) 29.92,17.07 30.1,16.89 v1(30.61,16.89)
SDA2: length 36.6
  TOP w0.152: TP1.1 28.94,15.16 R10.1 28.94,17.53 ; U5.43 26.5,20.05 26.59,19.96 26.59,19.1 26.82,18.87 v1(26.82,18.36) 27.66,17.53 27.9,17.53 27.98,17.61 28.42,17.61 28.5,17.53 28.94,17.53 ; 28.94,17.53 36.27,17.53 36.61,17.19 39.94,17.19 40.92,16.21 40.92,15.81 41.68,15.04 41.68,13.5 41.75,13.44 41.75,10.21 42.11,9.84 42.11,9.83 42.82,9.12 42.92,9.03 U4.41 ; U2.24 21.83,17.48 22.69,18.34 v1(24.16,18.34)
  BOTTOM w0.152: v1(26.82,18.36) 26.44,17.98 24.51,17.98 v1(24.16,18.34)
SDB: length 37.8
  TOP w0.152: v1(44.78,20.78) 43.27,20.78 42.39,21.66 41.95,21.66 41.63,21.35 41.63,19.59 41.07,19.02 37.36,19.02 37.03,19.35 35.76,19.35 35.38,19.74 35.38,20.86 34.5,21.74 34.5,22.07 34.21,22.36 34.21,22.6 34.04,22.78 34.04,23.19 v1(32.89,24.33) U5.54 ; v1(49.28,11.56) TP11.1 v1(46.38,9.52) ; R14.2 v1(45.01,9.52) 45.01,9.02 44.91,8.92 U4.36
  BOTTOM w0.152: v1(49.28,11.56) 48.76,11.56 48.31,12.01 48.31,13.79 44.78,17.32 v1(44.78,20.78) ; v1(46.38,9.52) v1(45.01,9.52)
STAT1: length 34.1
  TOP w0.152: v1(22,32.64) 24.26,32.64 25,33.38 U5.86 ; U1.7 8.54,43.94 8.26,43.66 8.1,43.66 7.9,43.46 v1(7.9,43.31)
  BOTTOM w0.152: v1(22,32.64) 22,35.69 18.26,39.42 18.26,44.86 17.27,45.85 9.17,45.85 7.9,44.58 v1(7.9,43.31)
STAT2: length 34.8
  TOP w0.152: v1(22.89,32.11) 24.15,32.11 25.5,33.45 U5.85 ; U1.6 v1(7.06,44.19)
  BOTTOM w0.152: v1(22.89,32.11) 22.89,32.61 22.3,33.2 22.3,35.81 18.57,39.55 18.57,45.01 17.4,46.18 9.05,46.18 v1(7.06,44.19)
USB_SEL: length 35.2
  TOP w0.152: U5.84 26,33.5 24.08,31.57 v1(23.47,31.57) ; v1(7.19,46.53) 7.55,46.89 7.61,46.89 7.71,46.99 U1.5
  BOTTOM w0.152: v1(23.47,31.57) 23.47,32.46 22.61,33.32 22.61,35.94 18.87,39.67 18.87,45.16 17.53,46.51 17.27,46.51 17.25,46.48 8.84,46.48 8.79,46.53 v1(7.19,46.53)
WIFI_#RESET: length 38.9
  TOP w0.152: v1(21.62,23.32) 21.62,22.81 21.5,22.69 U5.33 ; v1(7.36,8.39) R25.1 7.82,9.14 8.19,9.52 U7.32 ; v1(6.58,13.74) 6.58,14.3 6.81,14.53 6.81,18.39 6.45,18.75 5.66,18.75 TP14.1 6.02,20.32 8.94,20.32 9.75,21.13 14.02,21.13 15.29,19.86 15.29,19.78 v1(15.67,19.41)
  BOTTOM w0.152: v1(7.36,8.39) 6.98,8.76 6.98,11.08 6.58,11.49 v1(6.58,13.74) ; v1(15.67,19.41) 19.48,19.41 19.72,19.64 19.72,21.74 19.41,22.05 19.41,22.63 20.09,23.32 v1(21.62,23.32)
WIFI_CHIP_EN: length 32
  TOP w0.152: U7.7 v1(11.74,8.19) ; v1(20.5,25.3) 20.12,24.92 20.12,24.7 20.67,24.15 20.67,23.96 20.68,23.95 20.68,22.18 20.5,22.01 U5.31 ; TP18.1 v1(10.21,19.68)
  BOTTOM w0.152: v1(11.74,8.19) 11.74,12.75 11.62,12.87 11.62,18.86 11.15,19.33 10.57,19.33 v1(10.21,19.68) 13.89,23.37 15.62,23.37 15.82,23.16 17.86,23.16 19.99,25.3 v1(20.5,25.3)
WIFI_GPIO0: length 30.2
  TOP w0.152: TP15.1 v1(14.02,19.68) ; v1(26.53,22.84) 26.53,22.3 26.69,22.14 27.69,22.14 27.83,22 27.85,22 28,21.85 U5.46 ; U7.15 13.27,12.91 v1(13.53,13.17)
  BOTTOM w0.152: v1(13.53,13.17) 13.17,13.53 13.17,13.64 12.53,14.28 12.53,19.05 12.81,19.33 13.66,19.33 v1(14.02,19.68) 14.02,20.85 15.41,22.25 18.59,22.25 19.96,23.62 21.17,23.62 21.4,23.85 21.44,23.85 22.94,25.35 23.12,25.35 25.55,25.35 26.53,24.38 v1(26.53,22.84)
WIFI_GPIO2: length 32
  TOP w0.152: TP16.1 12.75,18.77 v1(12.75,20.02) ; U7.14 v1(13.45,12.41) ; v1(27.27,22.67) 27.59,22.67 27.96,22.31 28.42,22.31 28.5,22.22 U5.47
  BOTTOM w0.152: v1(13.45,12.41) 12.94,12.41 12.23,13.12 12.23,19.5 v1(12.75,20.02) 15.29,22.55 18.46,22.55 19.84,23.93 21.05,23.93 21.27,24.16 21.31,24.16 22.81,25.65 24.87,25.65 25.68,25.65 26.83,24.5 26.83,23.69 27.27,23.25 v1(27.27,22.67)
WIFI_RX: length 39.5
  TOP w0.152: U7.25 7.62,13.41 7.42,13.61 7.42,18.59 7.59,18.77 TP12.1 8.18,19.35 8.38,19.15 8.38,18.57 9.22,17.73 16.15,17.73 v1(16.74,18.31) ; v1(27.51,18.95) 26.97,19.49 26.97,19.96 27,20 U5.44
  BOTTOM w0.152: v1(16.74,18.31) 17.12,18.69 19.4,18.69 19.66,18.69 20.22,19.25 20.22,19.28 20.33,19.39 20.33,21.48 21.33,22.48 22.04,22.48 22.53,22.97 22.53,23.9 23.37,24.74 25.3,24.74 25.68,24.36 25.68,22.92 25.69,22.9 25.69,22.49 25.81,22.37 25.81,22.35 26.19,21.97 26.72,21.97 26.97,21.72 26.97,19.52 27.15,19.34 27.15,19.31 v1(27.51,18.95)
WIFI_TX: length 40.8
  TOP w0.152: v1(15.79,18.26) 15.28,18.26 15.05,18.03 9.35,18.03 8.69,18.69 8.69,19.28 8,19.96 6.93,19.96 TP13.1 7.11,18.57 7.11,13.49 7.69,12.91 U7.26 ; U5.45 v1(27.5,19.74)
  BOTTOM w0.152: v1(27.5,19.74) 27.5,22 27.37,22.14 27.05,22.14 26.91,22.28 26.31,22.28 26.11,22.48 26.11,22.5 25.99,22.61 25.99,23.03 25.98,23.04 25.98,24.49 25.43,25.04 23.06,25.04 22.22,24.21 22.22,23.1 21.91,22.78 21.2,22.78 20.02,21.61 20.02,19.52 19.91,19.41 19.91,19.38 19.53,19 16.52,19 v1(15.79,18.26)
WIFI_XPD_DCDC: length 29.8
  TOP w0.152: U5.32 21,21.98 20.98,22 20.98,24.08 20.97,24.09 v1(20.97,24.6) ; TP17.1 v1(11.48,20.02) ; v1(12.5,8.36) 12.24,8.61 U7.8
  BOTTOM w0.152: v1(12.5,8.36) 12.05,8.81 12.05,12.88 11.93,13 11.93,19.57 v1(11.48,20.02) 11.48,20.52 14.02,23.06 15.49,23.06 15.7,22.86 18.33,22.86 20.06,24.58 20.45,24.58 20.47,24.6 v1(20.97,24.6)
N00198: length 6.1
  TOP w0.508: R7.1 39.24,35.57 38.83,35.15 R8.2 38.2,35.15 Q1.3 39.5,34.15 39.52,34.16 LS1.1
N00230: length 1.2
  TOP w0.152: U3.16 38.31,47.57 38.53,47.79 R13.2
N00299: length 2.4
  TOP w0.152: U1.9 9.54,43.57 9.81,43.3 R5.2 11.08,43.3 W2.1
N00337: length 0.9
  TOP w0.152: R6.2 9.04,43.43 U1.8
N00409: length 5
  TOP w0.152: C15.1 41.15,41.93 Y1.3 38.38,41.93 38.04,42.26 R12.2 37.96,43.24 U3.10
N00478: length 1.4
  TOP w0.381: C32.1 10.15,36.13 10.11,36.17 U6.1
N00507: length 6.9
  TOP w0.152: C14.1 34.19,39.73 Y1.1 36.28,39.73 37.29,40.75 R12.1 37.29,43.36 37.46,43.53 U3.9
N00519: length 1.2
  TOP w0.508: R9.2 37.25,32.13 Q1.1
N00975: length 2.6
  TOP w0.152: U4.40 43.31,9.06 42.42,9.96 R15.2
N01037: length 2.6
  TOP w0.381: U6.7 6.42,38.35 6.41,38.36 R20.1 R22.2
N01220: length 0.9
  TOP w0.152: R21.1 4.68,33.91 DS16.2
N01340: length 1.7
  TOP w0.152: U3.19 36.46,47.78 35.93,48.3 C16.1
N01687: length 49
  TOP w0.152: v1(39.29,11.55) 39.29,9.29 41.02,7.56 U4.2 ; v1(24.89,40) 24.28,40.62 24.28,42.57 24.45,42.74 DS5.1
  BOTTOM w0.152: v1(24.89,40) 25.43,40 25.89,39.54 26.14,39.54 26.45,39.85 26.89,39.85 27.2,39.54 27.2,39.37 27.36,39.22 30.54,39.22 30.69,39.07 30.69,38.51 32.01,37.19 36.3,37.19 38.38,35.1 38.38,20.68 38.89,20.17 38.89,19.15 39.73,18.32 39.73,13.98 39.29,13.55 v1(39.29,11.55)
N01689: length 46.5
  TOP w0.152: DS5.2 24.83,41.08 25.53,40.39 25.53,39.71 26.75,38.48 v1(27.43,38.48) ; U4.3 40.99,7.17 38.73,9.42 v1(38.73,10.92)
  BOTTOM w0.152: v1(38.73,10.92) 38.73,13.42 39.42,14.1 39.42,18.19 38.59,19.03 38.59,20.04 38.07,20.55 38.07,34.98 36.17,36.88 31.89,36.88 30.62,38.15 28.53,38.15 28.2,38.48 v1(27.43,38.48)
N01691: length 46.4
  TOP w0.152: v1(38.2,11.56) 38.2,9.49 38.35,9.33 38.39,9.33 40.95,6.77 U4.4 ; v1(26.67,39.32) 25.97,40.02 DS5.3
  BOTTOM w0.152: v1(26.67,39.32) 26.67,38.79 26.78,38.68 26.78,38.37 27.3,37.85 30.49,37.85 31.76,36.58 36.05,36.58 37.77,34.85 37.77,20.42 38.28,19.91 38.28,18.9 39.12,18.06 39.12,14.23 38.2,13.32 v1(38.2,11.56)
N01749: length 51.5
  TOP w0.152: v1(37.67,10.92) 37.67,9.3 37.94,9.03 38.26,9.03 40.53,6.76 40.53,6.52 40.69,6.37 U4.5 ; DS6.1 22.86,42.16 22.86,40 23.24,39.62 v1(24.03,39.62)
  BOTTOM w0.152: v1(37.67,10.92) 37.67,13.21 38.81,14.36 38.81,17.94 37.98,18.77 37.98,19.79 37.46,20.3 37.46,34.72 35.92,36.27 31.63,36.27 30.36,37.54 27.18,37.54 25.44,39.28 25.44,39.28 25.29,39.43 25.07,39.43 24.89,39.25 24.41,39.25 v1(24.03,39.62)
